# Altium PCB LEDBoard.PcbDoc
Units mm, origin at the board's own origin, x right, y up, seen from the top; angles counter-clockwise.
Board outline 45 x 49 mm, 2 copper layers (Top Layer, Bottom Layer); 41 components, 31 nets, 81 pads, 0 vias.
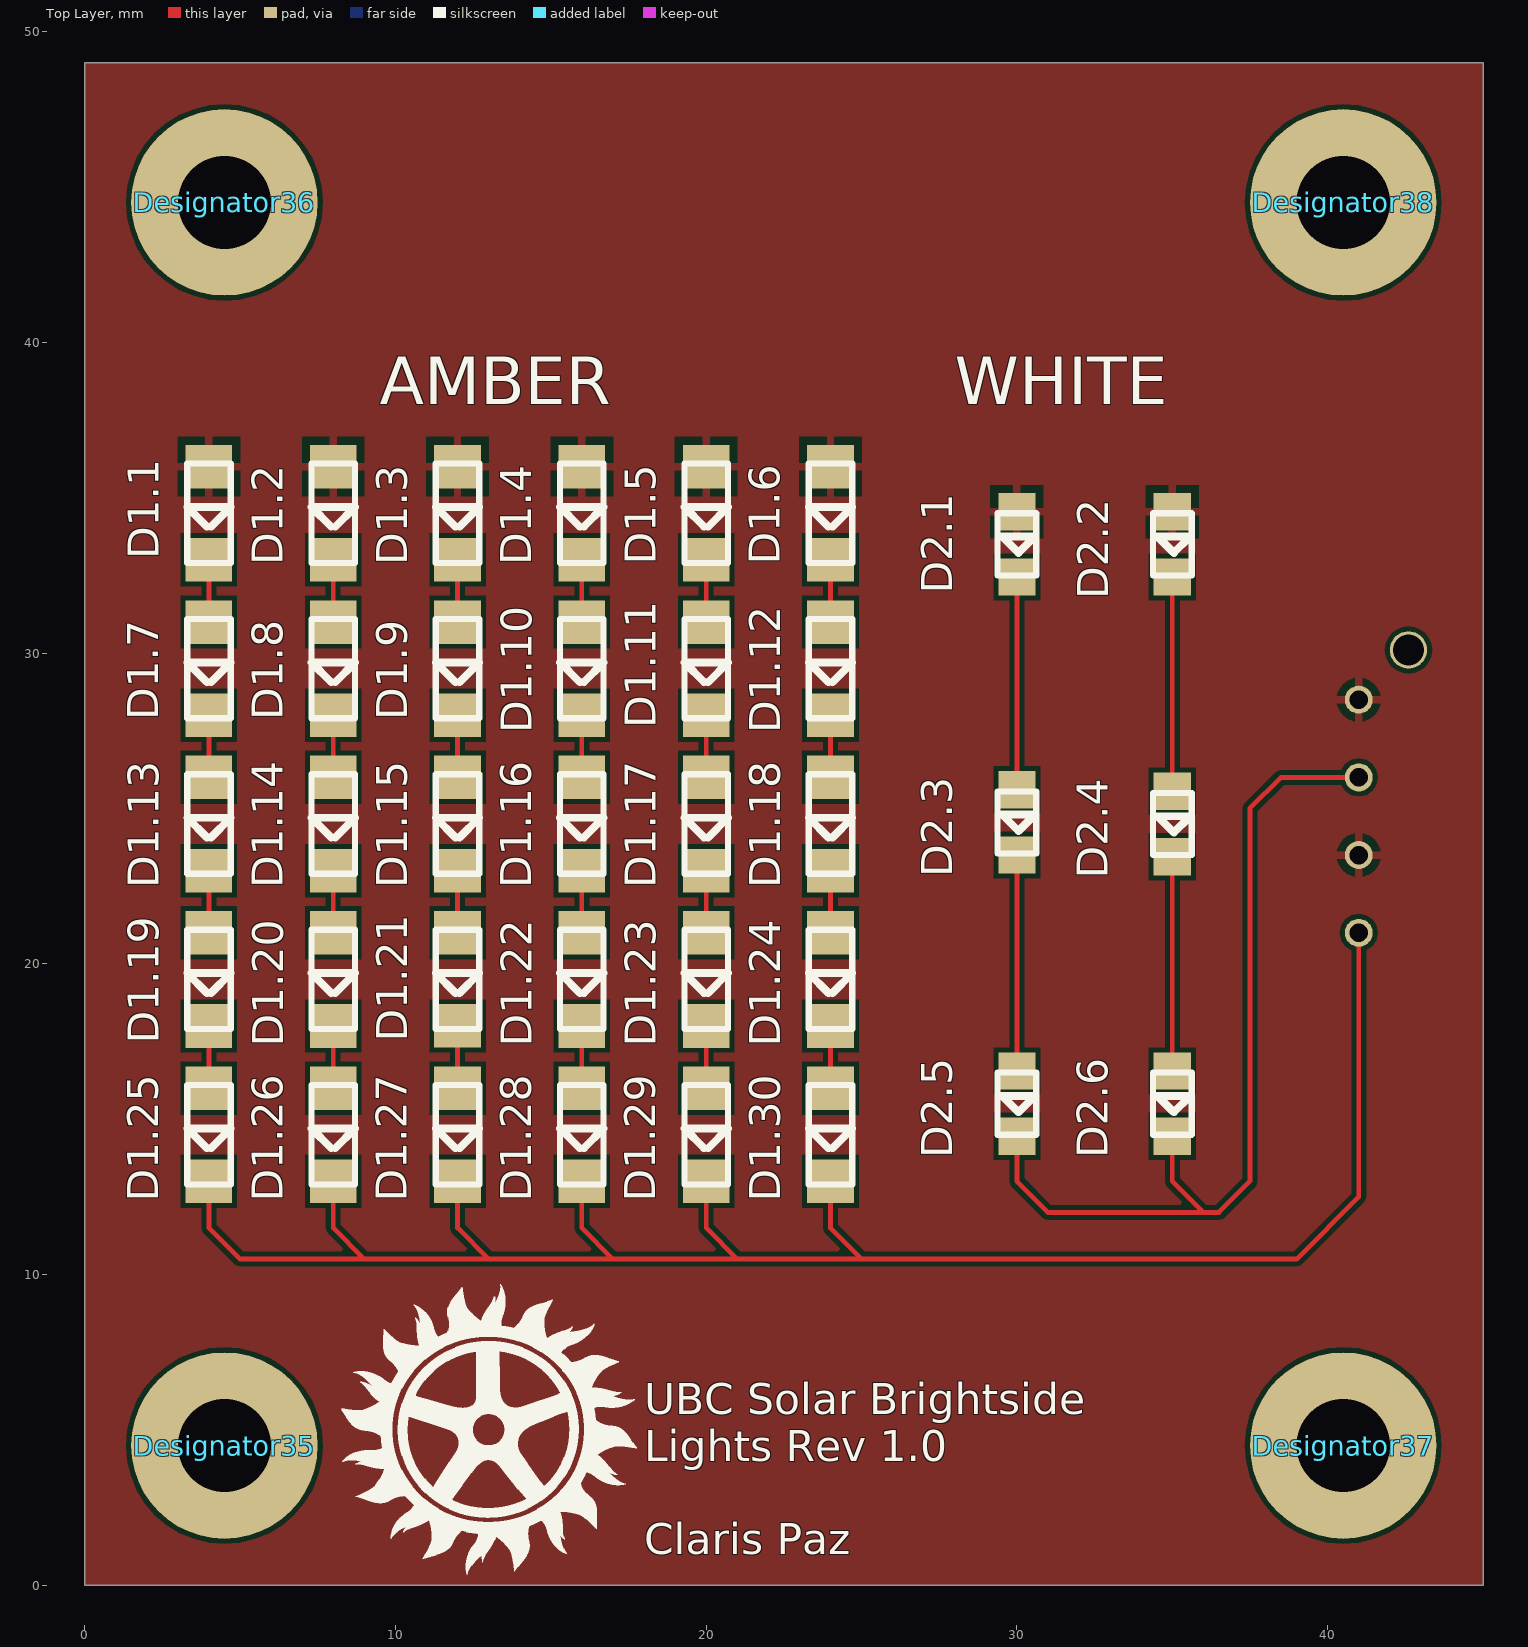
[diagram p0: Top Layer view]
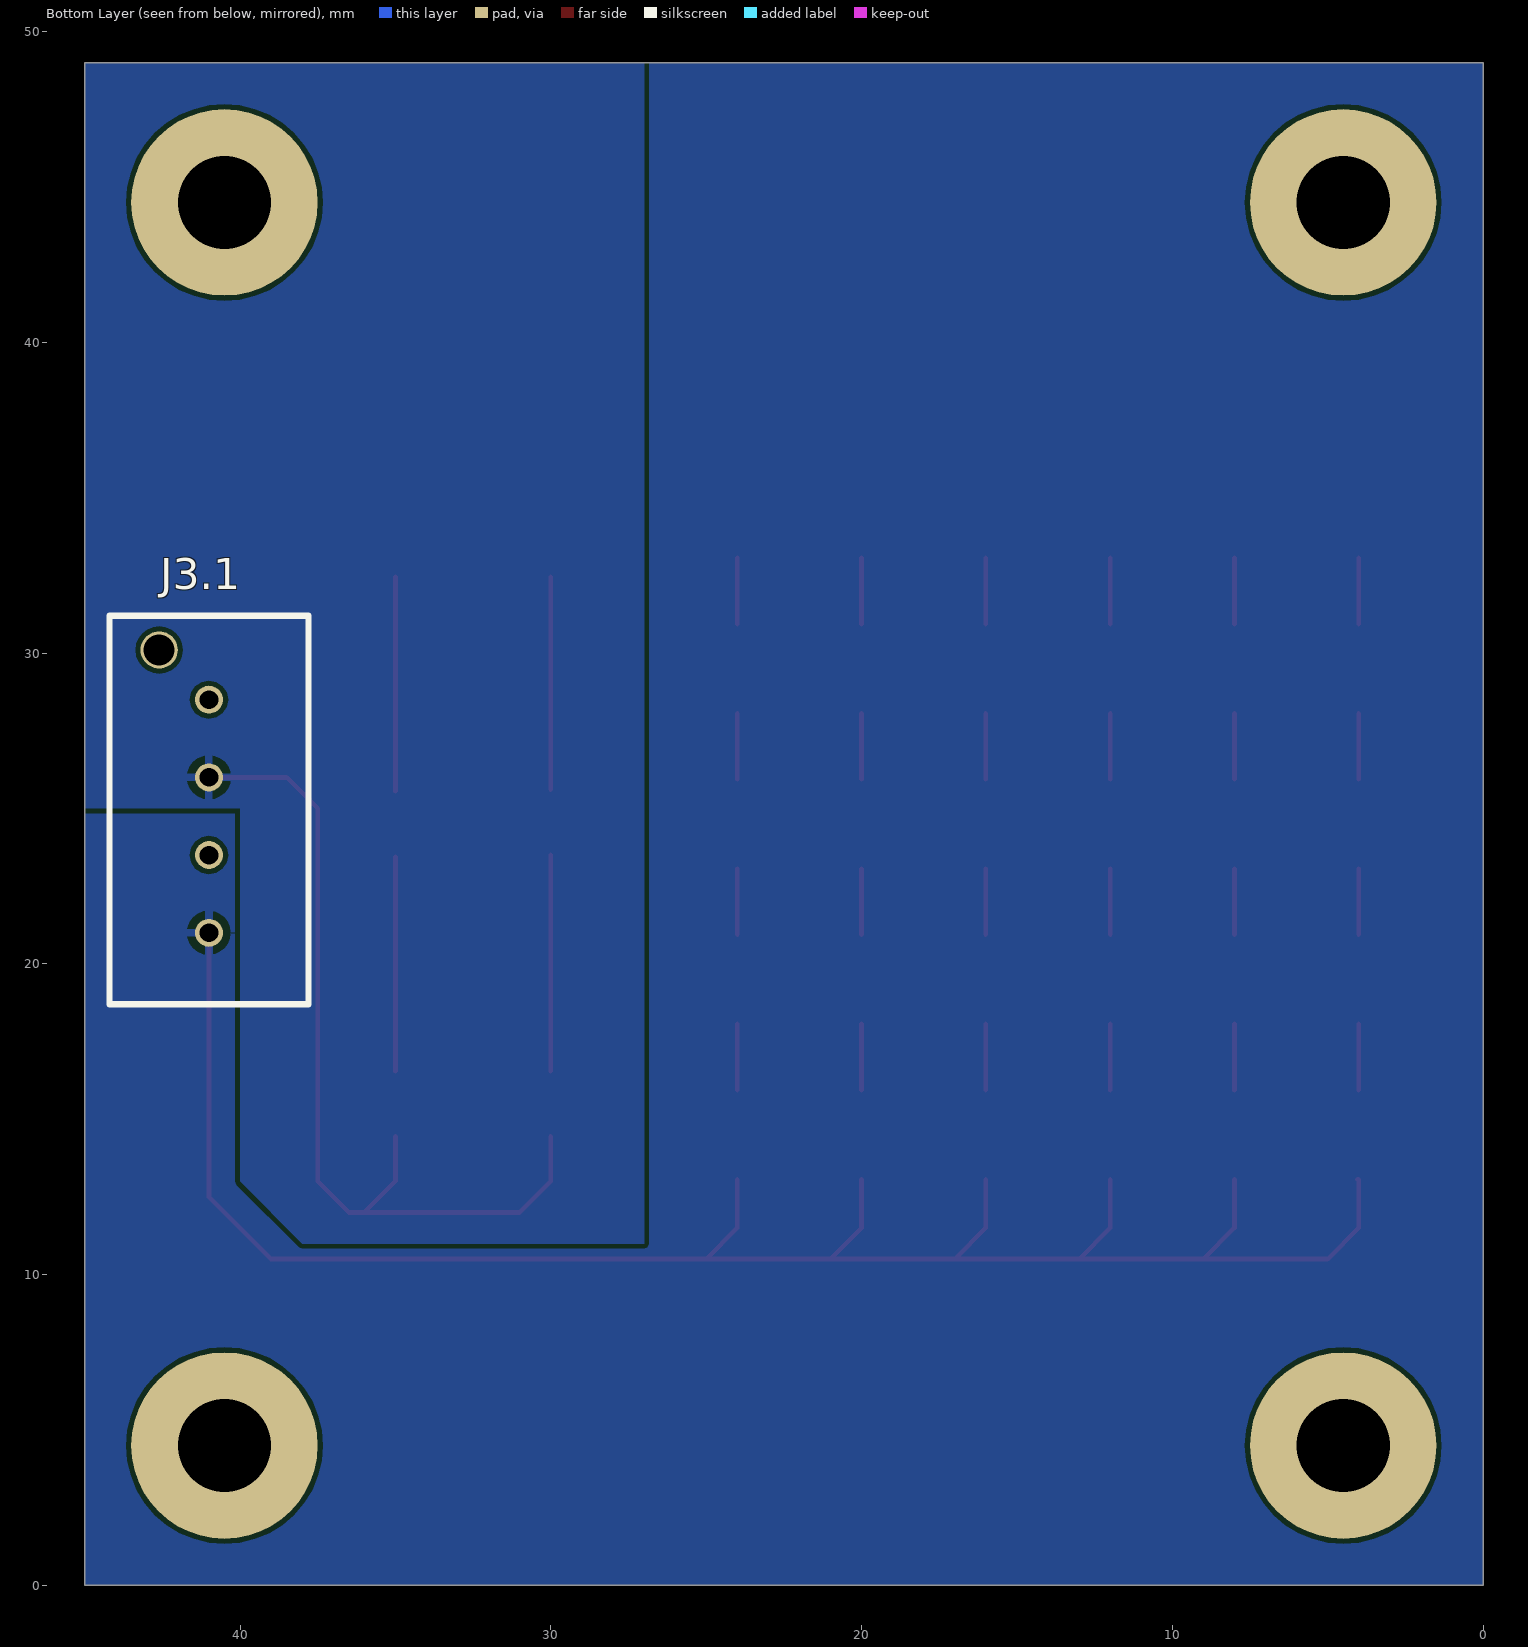
[diagram p1: Bottom Layer view, seen from below]
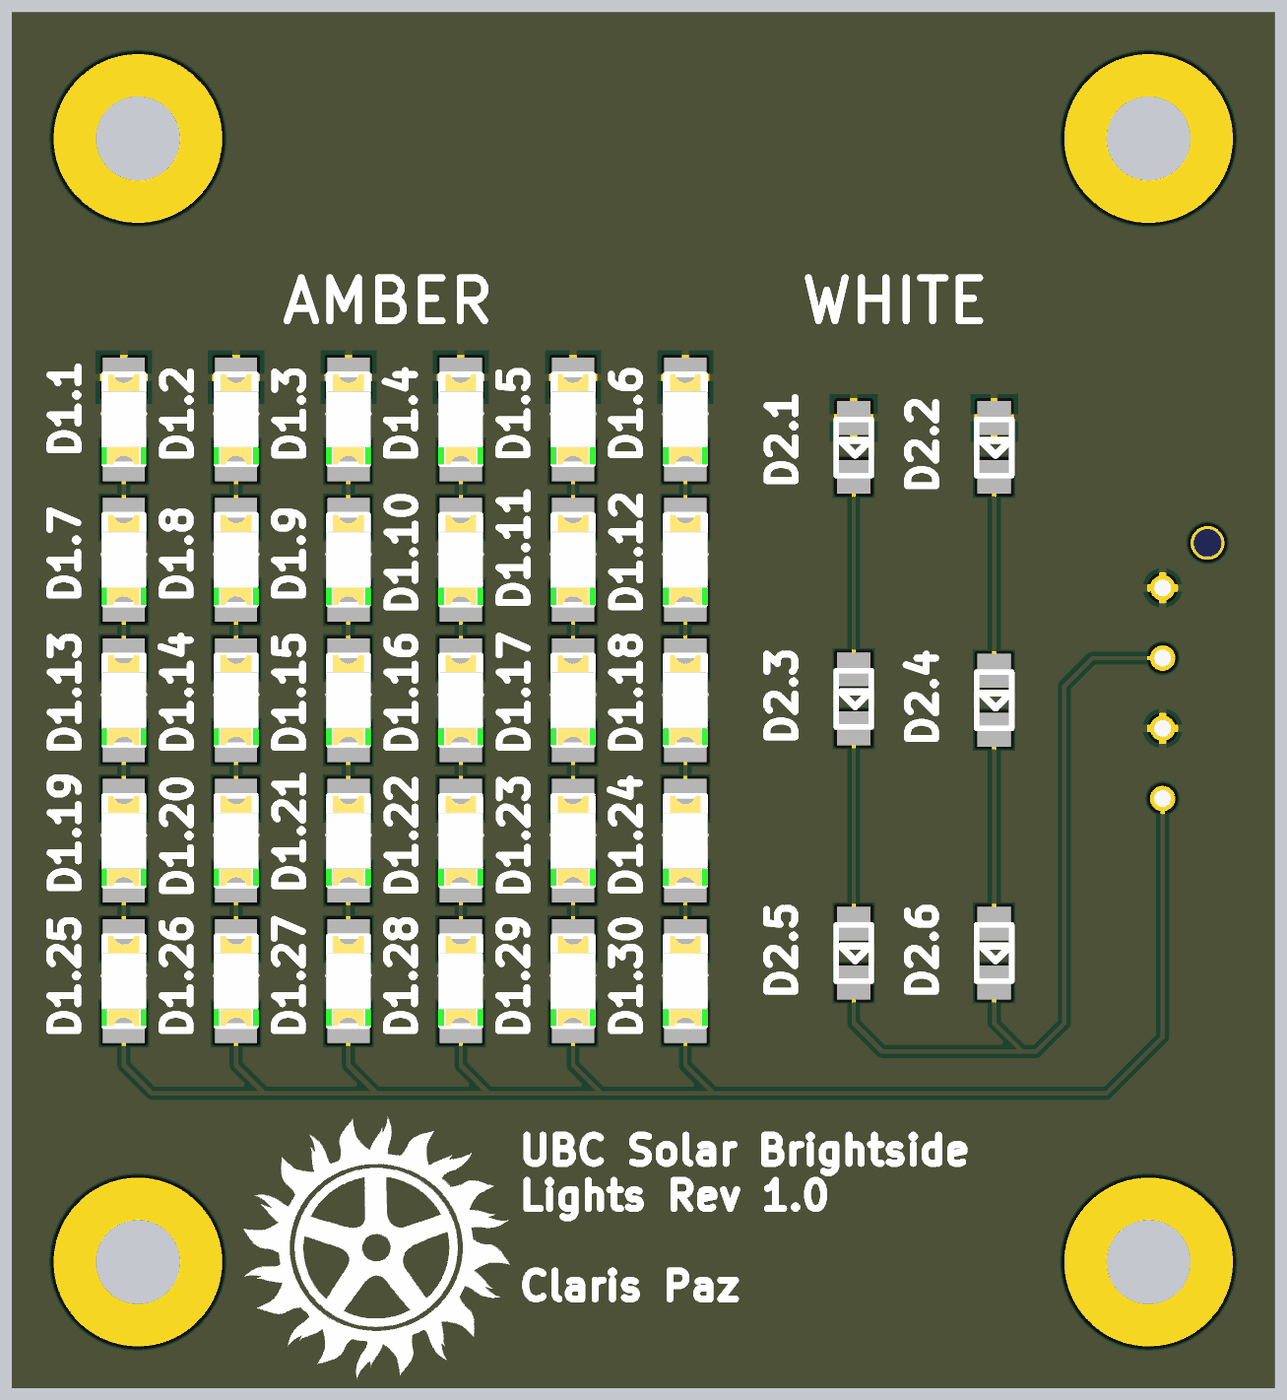
[diagram p2: 3D render of the assembled board from above, using the file's embedded part models]

## Layer stack, top to bottom
Top Solder: solder mask 0.0102, Solder Resist, Dk 3.5
Top Layer: signal copper 0.0356
Dielectric 1: dielectric 0.32, FR-4, Dk 4.8
Bottom Layer: signal copper 0.0356
Bottom Solder: solder mask 0.0102, Solder Resist, Dk 3.5

## Board outline
0,0 45,0 45,49 0,49

## Design rules (kind name [scope] priority, off if disabled: settings)
Clearance [All] p1: gap=0.152 ignorepadtopadclearanceinfootprint=FALSE
HoleSize [All] p1: absolutevalues=TRUE maxlimit=100 minlimit=0.4 maxpercent=80.000 minpercent=20.000
PolygonConnect [All] p1: connectstyle=Relief reliefconductorwidth=0.254 reliefentries=4 polygonreliefangle="90 Angle" airgapwidth=0.254
RoutingVias [All] p1: holewidth=0.4 width=0.8 viastyle="Through Hole" minholewidth=0.4 minwidth=0.6 maxholewidth=100 maxwidth=100
SilkToSilkClearance [All] p1: silktosilkclearance=0
SilkToSolderMaskClearance [IsPad] p1: minsilkscreentomaskgap=0 clearancetoexposedcopper=TRUE
SolderMaskExpansion [All] p1: expansion=0.102
Width [All] p1: maxlimit=100 minlimit=0.152 preferedwidth=0.152
27 further rules are at their usual default settings.

## Components (designator, comment, footprint, x,y, rotation, side; value= is the part's Value field where it differs from the comment)
D1.1 "AMBER" 150120AS75000 4,34.5 r90 top
D1.2 "AMBER" 150120AS75000 8,34.5 r90 top
D1.3 "AMBER" 150120AS75000 12,34.5 r90 top
D1.4 "AMBER" 150120AS75000 16,34.5 r90 top
D1.5 "AMBER" 150120AS75000 20,34.5 r90 top
D1.6 "AMBER" 150120AS75000 24,34.5 r90 top
D1.7 "AMBER" 150120AS75000 4,29.5 r90 top
D1.8 "AMBER" 150120AS75000 8,29.5 r90 top
D1.9 "AMBER" 150120AS75000 12,29.5 r90 top
D1.10 "AMBER" 150120AS75000 16,29.5 r90 top
D1.11 "AMBER" 150120AS75000 20,29.5 r90 top
D1.12 "AMBER" 150120AS75000 24,29.5 r90 top
D1.13 "AMBER" 150120AS75000 4,24.5 r90 top
D1.14 "AMBER" 150120AS75000 8,24.5 r90 top
D1.15 "AMBER" 150120AS75000 12,24.5 r90 top
D1.16 "AMBER" 150120AS75000 16,24.5 r90 top
D1.17 "AMBER" 150120AS75000 20,24.5 r90 top
D1.18 "AMBER" 150120AS75000 24,24.5 r90 top
D1.19 "AMBER" 150120AS75000 4,19.5 r90 top
D1.20 "AMBER" 150120AS75000 8,19.5 r90 top
D1.21 "AMBER" 150120AS75000 12,19.5 r90 top
D1.22 "AMBER" 150120AS75000 16,19.5 r90 top
D1.23 "AMBER" 150120AS75000 20,19.5 r90 top
D1.24 "AMBER" 150120AS75000 24,19.5 r90 top
D1.25 "AMBER" 150120AS75000 4,14.5 r90 top
D1.26 "AMBER" 150120AS75000 8,14.5 r90 top
D1.27 "AMBER" 150120AS75000 12,14.5 r90 top
D1.28 "AMBER" 150120AS75000 16,14.5 r90 top
D1.29 "AMBER" 150120AS75000 20,14.5 r90 top
D1.30 "AMBER" 150120AS75000 24,14.5 r90 top
D2.1 "WHITE" HSMW-C170-U0000 30,33.5 r90 top
D2.2 "WHITE" HSMW-C170-U0000 35,33.5 r90 top
D2.3 "WHITE" HSMW-C170-U0000 30,24.55 r90 top
D2.4 "WHITE" HSMW-C170-U0000 35,24.5 r90 top
D2.5 "WHITE" HSMW-C170-U0000 30,15.5 r90 top
D2.6 "WHITE" HSMW-C170-U0000 35,15.5 r90 top
Designator35 "Comment" "3mm Mounting Hole"#1 4,4 r0 top
Designator36 "Comment" "3mm Mounting Hole"#2 5,42.5 r0 top
Designator37 "Comment" "3mm Mounting Hole"#3 40.5,5.5 r0 top
Designator38 "Comment" "3mm Mounting Hole"#4 40,42 r0 top
J3.1 "B04B-XASK-1-A(LF)(SN)" B04B-XASK-1-A 41.8,25.55 r90 bottom

## Footprints (in the part's own frame and the unit in brackets; to place one, negate y for a bottom-side part, rotate by r counter-clockwise, add the part's x,y. Pads: shape width x height; smd on the part's side, far side on the other; paste and mask are expansions set on the pad)
"3mm Mounting Hole"#1 [mm]
  round 6 hole 3: 1(0.5,0.5)
"3mm Mounting Hole"#2 [mm]
  round 6 hole 3: 1(-0.5,2)
"3mm Mounting Hole"#3 [mm]
  round 6 hole 3: 1(0,-1)
"3mm Mounting Hole"#4 [mm]
  round 6 hole 3: 1(0.5,2.5)
150120AS75000 [mm]
  rect 1.4x1.5 smd: 1(-1.5,0) 2(1.5,0)
  silkscreen extent -1.6,-0.7 1.6,0.7, body extent -1.6,-0.8 1.6,0.8, height 0.68
B04B-XASK-1-A [mm]
  round 0.9 hole 0.6: 1(-4.55,-0.8) 2(-2.05,-0.8) 3(0.45,-0.8) 4(2.95,-0.8)
  round 1.2 hole 1: 5(4.55,0.8)
  silkscreen extent -6.85,-4 5.65,2.4, body extent -7.05,-4 5.45,2.4, height 8.81
HSMW-C170-U0000 [mm]
  rect 1.2x1.2 smd: 1(-1.05,0) 2(1.05,0)
  silkscreen extent -1,-0.63 1,0.63

## Part data
D1.1 D1.2 D1.3 D1.4 D1.5 D1.6 D1.7 D1.8 D1.9 D1.10 D1.11 D1.12 D1.13 D1.14 D1.15 D1.16 D1.17 D1.18 D1.19 D1.20 D1.21 D1.22 D1.23 D1.24 D1.25 D1.26 D1.27 D1.28 D1.29 D1.30: library part 150120AS75000, "WURTH ELEKTRONIK   150120AS75000   LED, 1206, AMBER, 140MCD, 605NM", Case/Package=1206, Case Code (Metric)=3216, Color=Orange, Forward Current=30mA, Forward Voltage=2V, Manufacturer 1="Wurth Electronics", Max Operating Temperature=85°C, Min Operating Temperature=-40°C, Package Quantity=3000, Supplier Part Number 1=732-4988-1-ND, Test Current=20mA, Case Code (Imperial)=1206, ComponentLink1Description=https://datasheet.ciiva.com/29561/150120as75000-29561877.pdf?src-supplier=Digi-Key, ComponentLink1URL=https://datasheet.ciiva.com/29561/150120as75000-29561877.pdf?src-supplier=Digi-Key, ComponentLink2Description=https://datasheet.ciiva.com/29279/759439-da-01-en-chipled-1206-w-kl-amb-150120as75000-29279037.pdf?src-supplier=Conrad, ComponentLink2URL=https://datasheet.ciiva.com/29279/759439-da-01-en-chipled-1206-w-kl-amb-150120as75000-29279037.pdf?src-supplier=Conrad, ComponentLink3Description=https://datasheet.ciiva.com/29561/150120as75000-29561878.pdf?src-supplier=Digi-Key, ComponentLink3URL=https://datasheet.ciiva.com/29561/150120as75000-29561878.pdf?src-supplier=Digi-Key, ComponentLink4Description=https://datasheet.ciiva.com/29561/150120as75000-29561879.pdf?src-supplier=Digi-Key, ComponentLink4URL=https://datasheet.ciiva.com/29561/150120as75000-29561879.pdf?src-supplier=Digi-Key, Dominant Wavelength=605nm, Height=0.68mm, Length=3.2mm, Lens Style=Clear,Rectangular, Luminous Intensity=140mcd, Manufacturer Part Number 1=150120AS75000, Mount="Surface Mount", Packaging="Tape and Reel", Pricing 1="1=0.21000, 50=0.19800, 100=0.17100, 500=0.14800 (USD)", REACH SVHC=Unknown, RoHS=Yes, Stock 1=2478, Supplier 1=Digi-Key, Viewing Angle=140°, Wavelength=605nm, Width=1.6mm
D2.1 D2.2 D2.3 D2.4 D2.5 D2.6: library part HSMW-C170-U0000, "Led, White, 670MCD, 0805", Case/Package=0805, Case Code (Metric)=2012, Color=White, Forward Voltage=3.4V, Manufacturer 1="Broadcom Avago", Supplier Part Number 1=516-3993-1-ND, Test Current=20mA, Case Code (Imperial)=0805, ComponentLink1Description=https://docs.broadcom.com/docs/HSMW-C170-U0000-DS100?src-supplier=Digi-Key, ComponentLink1URL=https://docs.broadcom.com/docs/HSMW-C170-U0000-DS100?src-supplier=Digi-Key, Height=0.9mm, Length=2mm, Lens Size=1.25mm, Lens Style=Flat, Luminous Intensity=670mcd, Manufacturer Part Number 1=HSMW-C170-U0000, Mount="Surface Mount", Packaging="Cut Tape", Pricing 1="1=1.05000, 10=0.81600, 100=0.52470, 500=0.44308, 1000=0.34980 (USD)", RoHS=No, Stock 1=12232, Supplier 1=Digi-Key, Viewing Angle=170°, Width=1.25mm
J3.1: "XA Series 4 Position 2.5mm Pitch Top Entry with Boss ThroughHole Shrouded Header", Manufacturer 1=JST, ComponentLink1Description=https://datasheet.ciiva.com/16500/jstb04b-xask-1-a-lf-sn-16500956.pdf?src-supplier=Future+Electronics, ComponentLink1URL=https://datasheet.ciiva.com/16500/jstb04b-xask-1-a-lf-sn-16500956.pdf?src-supplier=Future+Electronics, Lead Free="Lead Free", Manufacturer Part Number 1=B04B-XASK-1-A(LF)(SN), Mount="Through Hole", Number of Positions=4, Pitch=2.5mm, Pricing 1="1=0.25960, 10=0.25030, 100=0.16200, 500=0.13850, 1000=0.10710, 5000=0.10160, 10000=0.10130 (USD)", RoHS=Yes, Stock 1=380, Supplier 1=Arrow, Supplier Part Number 1=B04B-XASK-1-A(LF)(SN), Termination=Crimp

## Nets (pads, with @x,y where several pads share a name; then routed paths per layer and width w, separated by ;. In a path a pad name is that pad's centre, name@x,y a point inside that pad or via, vN(x,y) a via of type N, cw(c..) or ccw(c..) an arc to the next point about the centre after c; other vN are vias at no path point)
12V: D1.1.2 D1.2.2 D1.3.2 D1.4.2 D1.5.2 D1.6.2 D2.1.2 D2.2.2 J3.1.2 J3.1.4
DTR_FL-: D2.5.1 D2.6.1 J3.1.3 | length 28.6
  Top Layer w0.152: D2.5.1 30,13 31,12 36,12 ; D2.6.1 35,13 36,12 ; J3.1.3 38.5,26 37.5,25 37.5,13 36.5,12 36,12
LTS_F-: D1.25.1 D1.26.1 D1.27.1 D1.28.1 D1.29.1 D1.30.1 J3.1.1 | length 63.2
  Top Layer w0.152: D1.25.1@4.05,13.062 4,13.062 4,11.5 5,10.5 9,10.5 ; D1.26.1@8,13.062 8,11.5 9,10.5 ; D1.27.1@12,13.062 12,11.5 13,10.5 ; D1.28.1@16,13.062 16,11.5 17,10.5 ; D1.29.1@20,13.062 20,11.5 21,10.5 ; D1.30.1@24,13.062 24,11.5 25,10.5 ; J3.1.1 41,12.5 39,10.5 25,10.5 ; 9,10.5 13,10.5 ; 13,10.5 17,10.5 ; 17,10.5 21,10.5 ; 21,10.5 25,10.5
NetD1.1_1: D1.1.1 D1.7.2 | length 2.1
  Top Layer w0.152: D1.7.2@4,30.938 D1.1.1@4,33.062
NetD1.2_1: D1.2.1 D1.8.2 | length 2.1
  Top Layer w0.152: D1.8.2@8,30.938 D1.2.1@8,33.062
NetD1.3_1: D1.3.1 D1.9.2 | length 2.1
  Top Layer w0.152: D1.9.2@12,30.938 D1.3.1@12,33.062
NetD1.4_1: D1.4.1 D1.10.2 | length 2.1
  Top Layer w0.152: D1.10.2@16,30.938 D1.4.1@16,33.062
NetD1.5_1: D1.5.1 D1.11.2 | length 2.1
  Top Layer w0.152: D1.11.2@20,30.938 D1.5.1@20,33.062
NetD1.6_1: D1.6.1 D1.12.2 | length 2.1
  Top Layer w0.152: D1.12.2@24,30.938 D1.6.1@24,33.062
NetD1.7_1: D1.7.1 D1.13.2 | length 2.1
  Top Layer w0.152: D1.13.2@4,25.938 D1.7.1@4,28.062
NetD1.8_1: D1.8.1 D1.14.2 | length 2.1
  Top Layer w0.152: D1.14.2@8,25.938 D1.8.1@8,28.062
NetD1.9_1: D1.9.1 D1.15.2 | length 2.1
  Top Layer w0.152: D1.15.2@12,25.938 D1.9.1@12,28.062
NetD1.10_1: D1.10.1 D1.16.2 | length 2.1
  Top Layer w0.152: D1.16.2@16,25.938 D1.10.1@16,28.062
NetD1.11_1: D1.11.1 D1.17.2 | length 2.1
  Top Layer w0.152: D1.17.2@20,25.938 D1.11.1@20,28.062
NetD1.12_1: D1.12.1 D1.18.2 | length 2.1
  Top Layer w0.152: D1.18.2@24,25.938 D1.12.1@24,28.062
NetD1.13_1: D1.13.1 D1.19.2 | length 2.1
  Top Layer w0.152: D1.19.2@4,20.938 D1.13.1@4,23.062
NetD1.14_1: D1.14.1 D1.20.2 | length 2.1
  Top Layer w0.152: D1.20.2@8,20.938 D1.14.1@8,23.062
NetD1.15_1: D1.15.1 D1.21.2 | length 2.1
  Top Layer w0.152: D1.21.2@12,20.938 D1.15.1@12,23.062
NetD1.16_1: D1.16.1 D1.22.2 | length 2.1
  Top Layer w0.152: D1.22.2@16,20.938 D1.16.1@16,23.062
NetD1.17_1: D1.17.1 D1.23.2 | length 2.1
  Top Layer w0.152: D1.23.2@20,20.938 D1.17.1@20,23.062
NetD1.18_1: D1.18.1 D1.24.2 | length 2.1
  Top Layer w0.152: D1.24.2@24,20.938 D1.18.1@24,23.062
NetD1.19_1: D1.19.1 D1.25.2 | length 2.1
  Top Layer w0.152: D1.25.2@4,15.938 D1.19.1@4,18.062
NetD1.20_1: D1.20.1 D1.26.2 | length 2.1
  Top Layer w0.152: D1.26.2@8,15.938 D1.20.1@8,18.062
NetD1.21_1: D1.21.1 D1.27.2 | length 2.1
  Top Layer w0.152: D1.27.2@12,15.938 D1.21.1@12,18.062
NetD1.22_1: D1.22.1 D1.28.2 | length 2.1
  Top Layer w0.152: D1.28.2@16,15.938 D1.22.1@16,18.062
NetD1.23_1: D1.23.1 D1.29.2 | length 2.1
  Top Layer w0.152: D1.29.2@20,15.938 D1.23.1@20,18.062
NetD1.24_1: D1.24.1 D1.30.2 | length 2.1
  Top Layer w0.152: D1.30.2@24,15.938 D1.24.1@24,18.062
NetD2.1_1: D2.1.1 D2.3.2 | length 6.9
  Top Layer w0.152: D2.3.2 D2.1.1
NetD2.2_1: D2.2.1 D2.4.2 | length 6.9
  Top Layer w0.152: D2.4.2 D2.2.1
NetD2.3_1: D2.3.1 D2.5.2 | length 6.9
  Top Layer w0.152: D2.5.2 D2.3.1
NetD2.4_1: D2.4.1 D2.6.2 | length 6.9
  Top Layer w0.152: D2.6.2 D2.4.1
pads on no net: Designator35.1 Designator36.1 Designator37.1 Designator38.1 J3.1.5

## Polygon pours and split planes (outlines as drawn)
LTS_F- on Bottom Layer "Bottom Layer-LTS_F-" (solid, pour order 100): 0,49 27,49 27,11 38,11 40,13 40,25 45,25 45,0 0,0
DTR_FL- on Bottom Layer "Bottom Layer-DTR_FL- 4" (solid, pour order 98): 27,49 27,11 38,11 40,13 40,25 45,25 45,49
LTS_F- on Bottom Layer "Bottom Layer-LTS_F- 1" (solid, pour order 66): 49,43.5
DTR_FL- on Bottom Layer "Bottom Layer-DTR_FL-" (solid, pour order 60): 35.835,50
DTR_FL- on Bottom Layer "Bottom Layer-DTR_FL- 5" (solid, pour order 54): 35.835,50
DTR_FL- on Bottom Layer "Bottom Layer-DTR_FL- 1" (solid, pour order 34): 0,50
DTR_FL- on Bottom Layer "Bottom Layer-DTR_FL- 2" (solid, pour order 30): 66,50
DTR_FL- on Bottom Layer "Bottom Layer-DTR_FL- 3" (solid, pour order 18): 134,50
12V on Top Layer "Top Layer-12V" (solid, pour order 92): 0,49 45,49 45,0 0,0
12V on Top Layer "Top Layer-12V 1" (solid, pour order 90): 0,51

## Silkscreen, mask and mechanical layers (free items; w line width, h text height)
Top Overlay:
  drawing of 2 lines, arcs and shapes, not listed
  text "AMBER" at 9.5,38 h1.52
  text "WHITE" at 28,38 h1.52
  text "UBC Solar Brightside / Lights Rev 1.0 /  / Claris Paz" at 18,1 h1